# Altium PCB TP1 Embebidos.PcbDoc
Units mm, origin at the board's own origin, x right, y up, seen from the top; angles counter-clockwise.
Board outline 100 x 100 mm, 2 copper layers (Top Layer, Bottom Layer); 23 components, 30 nets, 140 pads, 0 vias.
Unrouted connection lines stored in the file: 8.
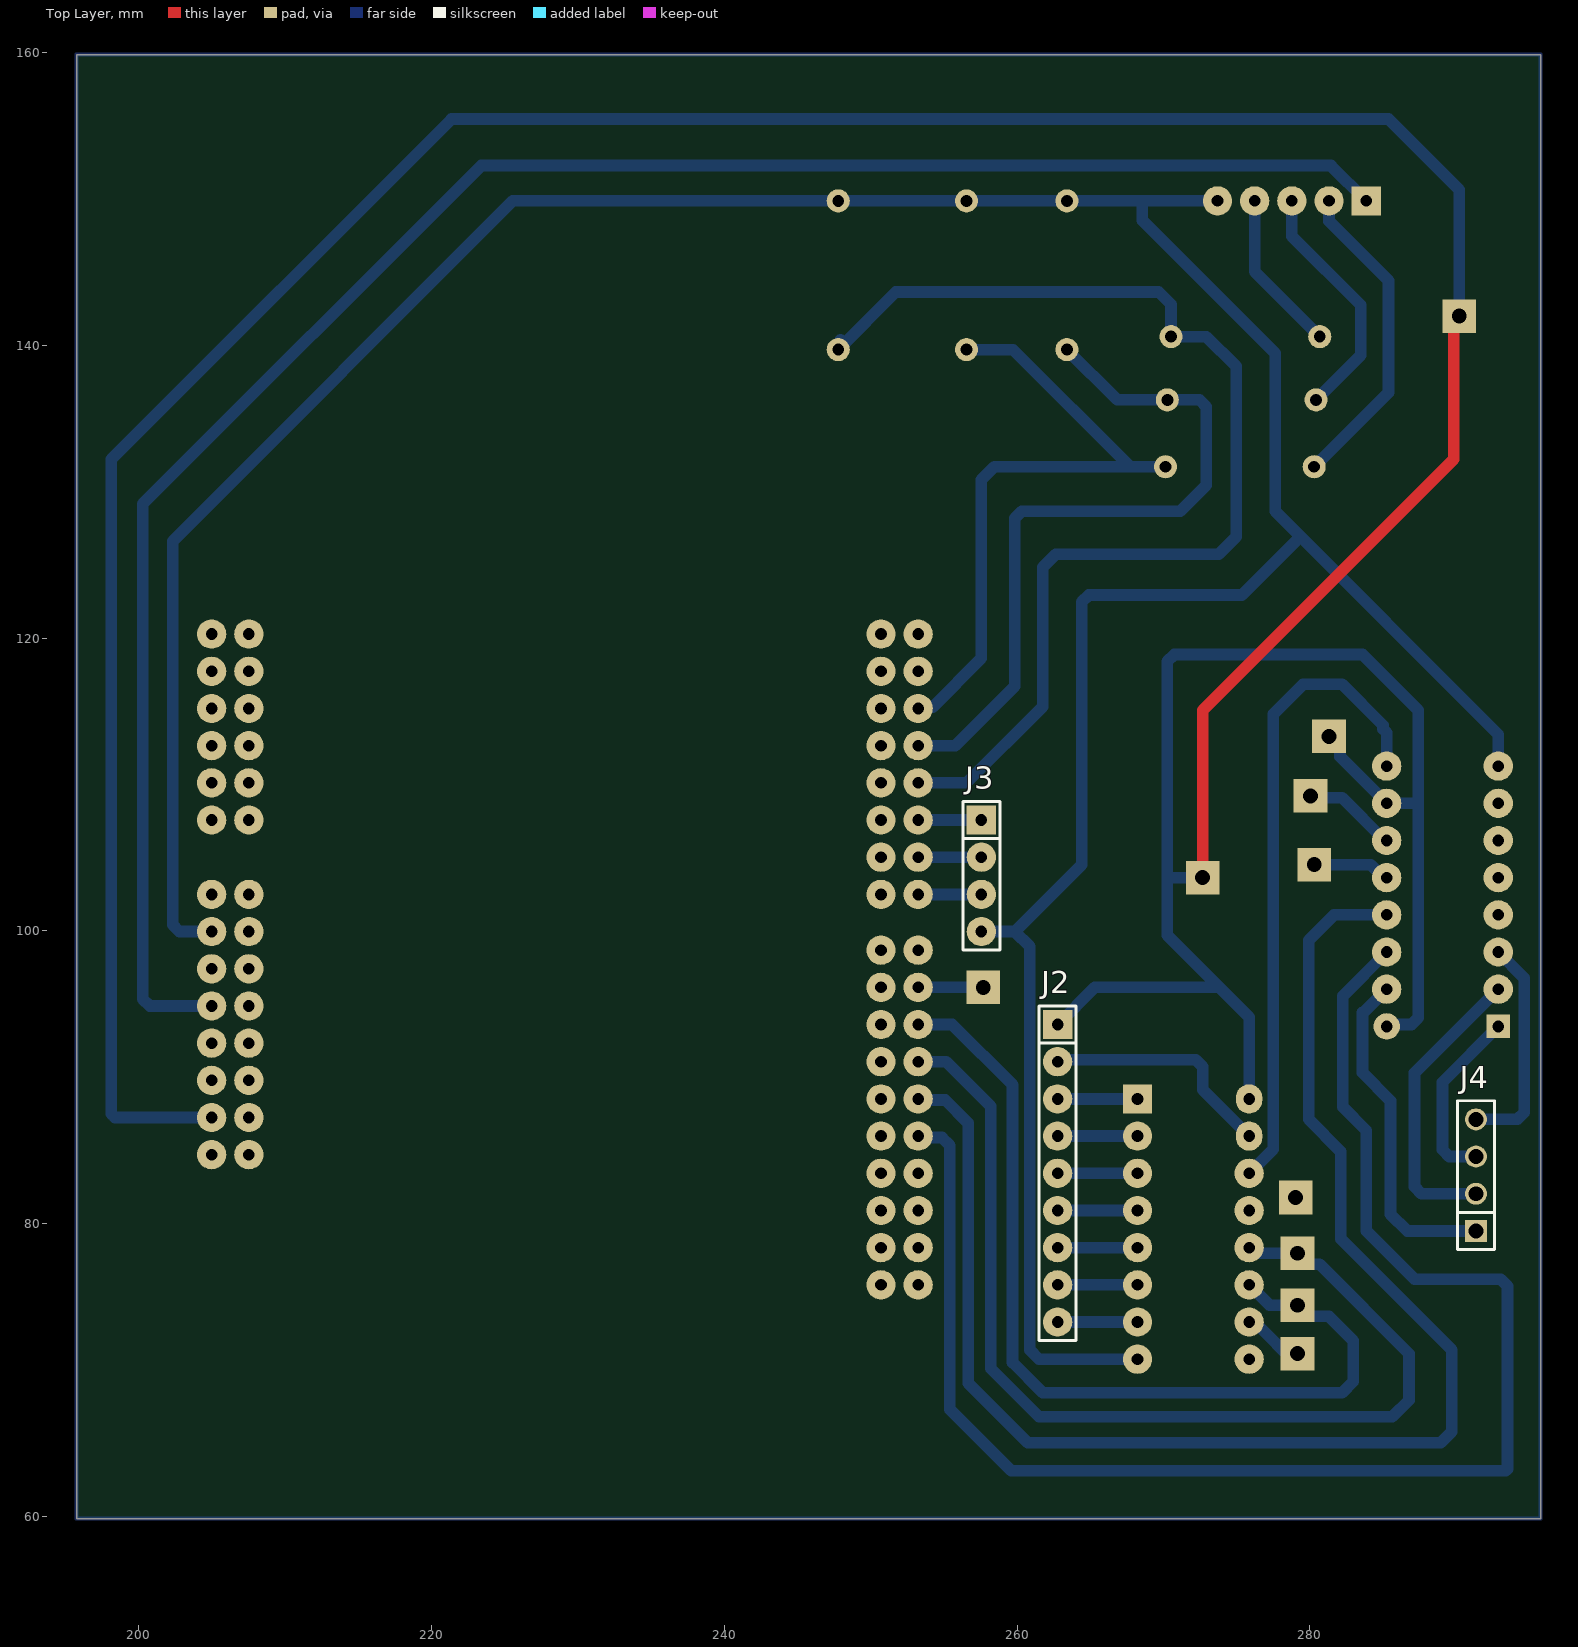
[diagram p0: Top Layer view]
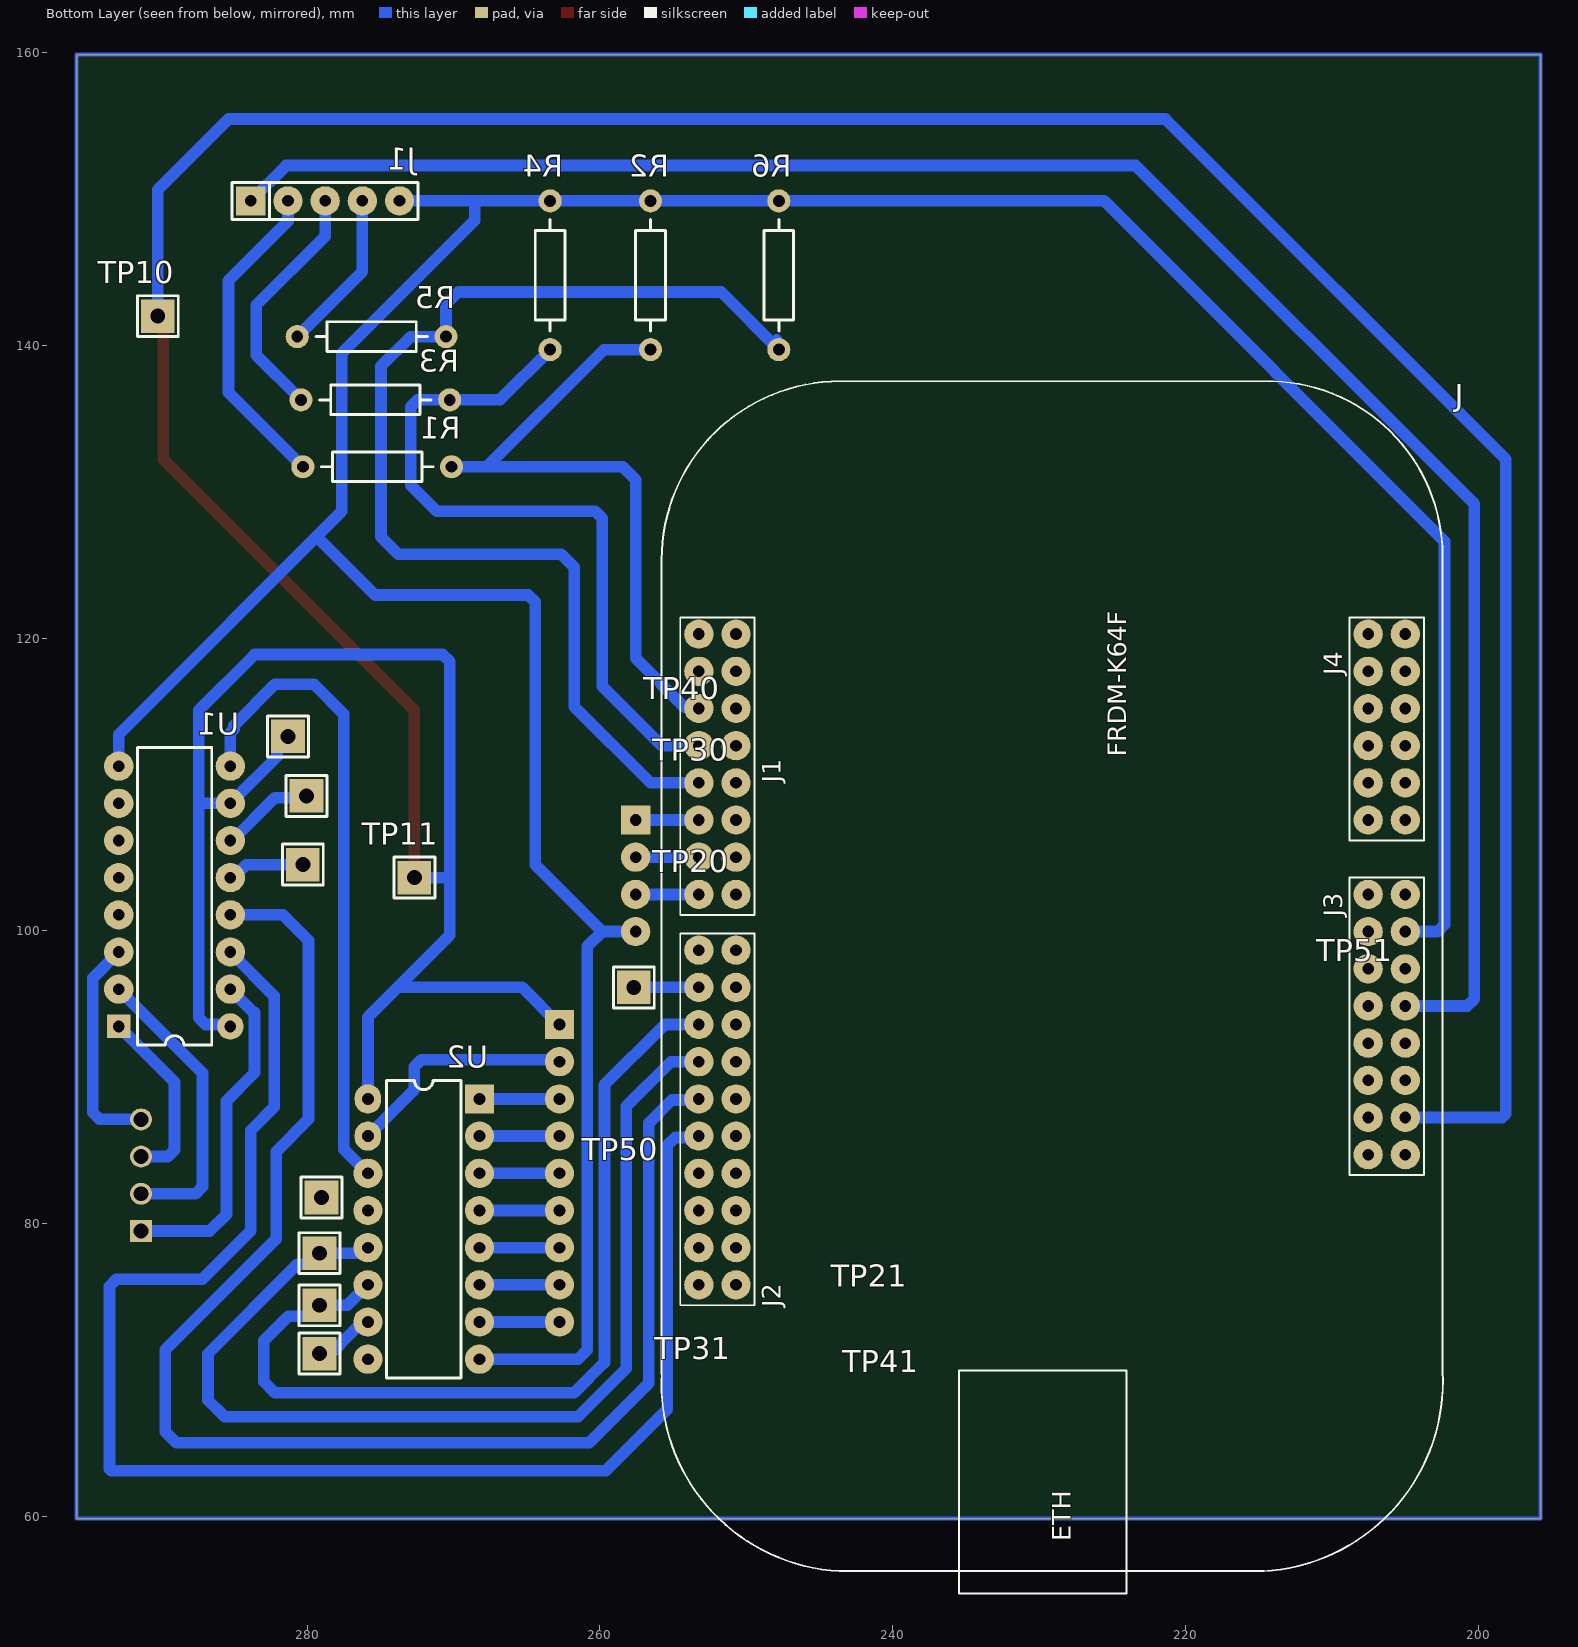
[diagram p1: Bottom Layer view, seen from below]

## Layer stack, top to bottom
Top Solder: solder mask 0.0102, Solder Resist, Dk 3.5
Top Layer: signal copper 0.0356
Dielectric 1: dielectric 0.32, FR-4, Dk 4.8
Bottom Layer: signal copper 0.0356
Bottom Solder: solder mask 0.0102, Solder Resist, Dk 3.5

## Board outline
195.747,59.858 295.747,59.858 295.747,159.858 195.747,159.858

## Design rules (kind name [scope] priority, off if disabled: settings)
Clearance [All] p1: gap=0.254 ignorepadtopadclearanceinfootprint=FALSE
PolygonConnect [All] p1: connectstyle=Relief reliefconductorwidth=0.254 reliefentries=4 polygonreliefangle="90 Angle" airgapwidth=0.254
RoutingVias [All] p1: holewidth=0.711 width=1.27 viastyle="Through Hole" minholewidth=0.711 minwidth=1.27 maxholewidth=0.711 maxwidth=1.27
SolderMaskExpansion [All] p1: expansion=0.102 istentingtop=FALSE
SupplyNets "Schematic Supply Nets" [InNet('GND')] p1: voltage=0.000
Width [All] p1: maxlimit=1 minlimit=0.5 preferedwidth=0.8 minimp=50.000000 maximp=50.000000 favimp=50.000000
30 further rules are at their usual default settings.

## Components (designator, comment, footprint, x,y, rotation, side; value= is the part's Value field where it differs from the comment)
J "FRDM-K64F" FRDM-K64F 229.108,96.647 r90 bottom
J1 "CON5" SIP5 283.845,149.86 r180 bottom
J2 "CON9" SIP9 262.763,93.599 r270 top
J3 "CON4" SIP4#1 257.556,103.759 r270 top
J4 "CON4" SIP4#2 291.338,83.312 r90 top
R1 "3K3" RES400 270.129,131.699 r0 bottom
R2 "6K8" RES400 256.54,149.86 r270 bottom
R3 "3K3" RES400 270.256,136.271 r0 bottom
R4 "6K8" RES400 263.398,149.86 r270 bottom
R5 "3K3" RES400 270.51,140.589 r0 bottom
R6 "6K8" RES400 247.777,149.86 r270 bottom
TP10 "TP" TPTH 290.195,141.986 r90 bottom
TP11 "TP" TPTH 272.669,103.632 r180 bottom
TP20 "TP" TPTH 280.289,104.521 r90 bottom
TP21 "TP" TPTH 279.146,77.978 r90 bottom
TP30 "TP" TPTH 280.035,109.22 r90 bottom
TP31 "TP" TPTH 279.146,74.422 r90 bottom
TP40 "TP" TPTH 281.305,113.284 r90 bottom
TP41 "TP" TPTH 279.146,71.12 r90 bottom
TP50 "TP" TPTH 279.019,81.788 r90 bottom
TP51 "TP" TPTH 257.683,96.139 r90 bottom
U1 "74HC595" DIP16#1 292.862,93.472 r180 bottom
U2 "74HC595" DIP16#2 268.224,88.519 r0 bottom

## Footprints (in the part's own frame and the unit in brackets; to place one, negate y for a bottom-side part, rotate by r counter-clockwise, add the part's x,y. Pads: shape width x height; smd on the part's side, far side on the other; paste and mask are expansions set on the pad)
DIP16#1 [mm]
  rect 1.6x1.6 hole 0.8: 1(0,0)
  round 2 hole 0.8: 2(0,2.54) 3(0,5.08) 4(0,7.62) 5(0,10.16) 6(0,12.7) 7(0,15.24) 8(0,17.78) 9(7.62,17.78) 10(7.62,15.24) 11(7.62,12.7) 12(7.62,10.16) 13(7.62,7.62) 14(7.62,5.08) 15(7.62,2.54)
  round 1.8 hole 0.8: 16(7.62,0)
  silkscreen extent 1.27,-1.27 6.35,19.05, body extent -0.08,-1.11 7.79,18.89, height 1.98
DIP16#2 [mm]
  rect 2x2 hole 0.8: 1(0,0)
  round 2 hole 0.8: 2(0,2.54) 3(0,5.08) 4(0,7.62) 5(0,10.16) 6(0,12.7) 7(0,15.24) 8(0,17.78) 9(7.62,17.78) 10(7.62,15.24) 11(7.62,12.7) 12(7.62,10.16) 13(7.62,7.62) 14(7.62,5.08)
  oval 1.8x2 hole 0.8: 15(7.62,2.54) 16(7.62,0)
  silkscreen extent 1.27,-1.27 6.35,19.05, body extent -0.08,-1.11 7.79,18.89, height 1.98
FRDM-K64F [mm]
  round 2 hole 0.8: J1-1(23.622,21.59) J1-2(23.622,24.13) J1-3(21.082,21.59) J1-4(21.082,24.13) J1-5(18.542,21.59) J1-6(18.542,24.13) J1-7(16.002,21.59) J1-8(16.002,24.13) J1-9(13.462,21.59) J1-10(13.462,24.13) J1-11(10.922,21.59) J1-12(10.922,24.13) J1-13(8.382,21.59) J1-14(8.382,24.13) J1-15(5.842,21.59) J1-16(5.842,24.13) J2-1(2.032,21.59) J2-2(2.032,24.13) J2-3(-0.508,21.59) J2-4(-0.508,24.13) J2-5(-3.048,21.59) J2-6(-3.048,24.13) J2-7(-5.588,21.59) J2-8(-5.588,24.13) J2-9(-8.128,21.59) J2-10(-8.128,24.13) J2-11(-10.668,21.59) J2-12(-10.668,24.13) J2-13(-13.208,21.59) J2-14(-13.208,24.13) J2-15(-15.748,21.59) J2-16(-15.748,24.13) J2-17(-18.288,21.59) J2-18(-18.288,24.13) J2-19(-20.828,21.59) J2-20(-20.828,24.13) J3-1(-11.938,-21.59) J3-2(-11.938,-24.13) J3-3(-9.398,-21.59) J3-4(-9.398,-24.13) J3-5(-6.858,-21.59) J3-6(-6.858,-24.13) J3-7(-4.318,-21.59) J3-8(-4.318,-24.13) J3-9(-1.778,-21.59) J3-10(-1.778,-24.13) J3-11(0.762,-21.59) J3-12(0.762,-24.13) J3-13(3.302,-21.59) J3-14(3.302,-24.13) J3-15(5.842,-21.59) J3-16(5.842,-24.13) J4-1(10.922,-21.59) J4-2(10.922,-24.13) J4-3(13.462,-21.59) J4-4(13.462,-24.13) J4-5(16.002,-21.59) J4-6(16.002,-24.13) J4-7(18.542,-21.59) J4-8(18.542,-24.13) J4-9(21.082,-21.59) J4-10(21.082,-24.13) J4-11(23.622,-21.59) J4-12(23.622,-24.13)
  silkscreen extent -41.91,-26.69 40.89,26.69
RES400 [mil]
  round 62 hole 32: 1(0,0) 2(400,0)
  silkscreen extent 50,-40 350,40, body extent -12,-46 412,45, height 80
SIP4#1 [mm]
  rect 2x2 hole 0.8: 1(-3.81,0)
  round 2 hole 0.8: 2(-1.27,0) 3(1.27,0) 4(3.81,0)
  silkscreen extent -5.08,-1.27 5.08,1.27, body extent -5.08,-1.27 5.08,1.27, height 8.38
SIP4#2 [mm]
  rect 1.5x1.5 hole 1.016: 1(-3.81,0)
  round 1.5 hole 1.016: 2(-1.27,0) 3(1.27,0) 4(3.81,0)
  silkscreen extent -5.08,-1.27 5.08,1.27, body extent -5.08,-1.27 5.08,1.27, height 8.38
SIP5 [mm]
  rect 2x2 hole 0.8: 1(0,0)
  round 2 hole 0.8: 2(2.54,0) 3(5.08,0) 4(7.62,0) 5(10.16,0)
  silkscreen extent -1.27,-1.27 11.43,1.27, body extent -1.27,-1.27 11.43,1.27, height 2.54
SIP9 [mm]
  rect 2x2 hole 0.8: 1(0,0)
  round 2 hole 0.8: 2(2.54,0) 3(5.08,0) 4(7.62,0) 5(10.16,0) 6(12.7,0) 7(15.24,0) 8(17.78,0) 9(20.32,0)
  silkscreen extent -1.27,-1.27 21.59,1.27, body extent -1.27,-1.3 21.59,1.24, height 8.38
TPTH [mm]
  rect 2.3x2.3 hole 1.016: 1(0,0)
  silkscreen extent -1.4,-1.4 1.4,1.4, body extent -1.27,-1.27 1.27,1.27, height 6.04

## Part data
J: "K24, K63, K64, mbed-Enabled Development Freedom Kinetis ARMÂ® CortexÂ®-M4 MCU 32-Bit Embedded Evaluation Board", Package=None, Availability=Unavailable, MF="NXP USA", MP=FRDM-K64F, Price=None, SnapEDA_Link=https://www.snapeda.com/parts/FRDM-K64F/NXP%20USA%20Inc./view-part/508270/?ref=snap
R1 R2 R3 R4 R5 R6: library part RES

## Nets (pads, with @x,y where several pads share a name; then routed paths per layer and width w, separated by ;. In a path a pad name is that pad's centre, name@x,y a point inside that pad or via, vN(x,y) a via of type N, cw(c..) or ccw(c..) an arc to the next point about the centre after c; other vN are vias at no path point)
3V3: J2.1 J.J3-4 TP10.1 TP11.1 TP40.1 TP41.1 U1.10 U1.16 U2.10 U2.16 | length 311.6
  Top Layer w0.8: TP11.1 272.669,115.062 289.814,132.207 289.814,141.605 TP10.1
  Bottom Layer w0.8: J.J3-4 198.374,87.249 198.12,87.503 198.12,132.207 221.361,155.448 285.369,155.448 290.195,150.622 TP10.1 ; J2.1 265.303,96.139 273.812,96.139 ; TP11.1 270.256,103.632 ; U2.10 276.04,73.279 276.402,72.917 276.587,72.917 278.765,70.739 TP41.1 ; U2.16 275.844,94.107 273.812,96.139 ; TP40.1 282.055,112.534 282.055,111.899 U1.10 287.401,108.712 ; U1.16@285.115,93.599 286.932,93.599 287.401,94.068 287.401,108.712 ; 270.256,103.632 270.256,118.403 270.725,118.872 283.591,118.872 287.401,115.062 287.401,108.712 ; 270.256,103.632 270.256,99.695 273.812,96.139
5V: J1.1 J.J3-10 | length 132.9
  Bottom Layer w0.8: J.J3-10 200.748,94.869 200.279,95.338 200.279,129.159 223.393,152.273 281.432,152.273 J1.1
A: J.J2-12 U1.14 | length 105
  Bottom Layer w0.8: J.J2-12 253.335,85.882 254.859,85.882 255.397,85.344 255.397,67.31 259.588,63.119 293.37,63.119 293.497,63.246 293.497,75.731 293.028,76.2 287.147,76.2 283.845,79.502 283.845,86.36 282.232,87.973 282.232,95.542 U1.14
CLOCK: J1.3 R3.2 | length 16.8
  Bottom Layer w0.8: J1.3 278.765,147.447 283.464,142.748 283.464,139.319 R3.2
CSEGA: J2.2 U2.15 | length 16.2
  Bottom Layer w0.8: J2.2 262.89,91.186 272.2,91.186 272.669,90.717 272.669,89.154 U2.15
CSEGB: J2.3 U2.1 | length 5.5
  Bottom Layer w0.8: J2.3 U2.1
CSEGC: J2.4 U2.2 | length 5.5
  Bottom Layer w0.8: J2.4 U2.2
CSEGD: J2.5 U2.3 | length 5.5
  Bottom Layer w0.8: J2.5 U2.3
CSEGDP: J2.9 U2.7 | length 5.5
  Bottom Layer w0.8: J2.9 U2.7
CSEGE: J2.6 U2.4 | length 5.5
  Bottom Layer w0.8: J2.6 U2.4
CSEGF: J2.7 U2.5 | length 5.5
  Bottom Layer w0.8: J2.7 U2.5
CSEGG: J2.8 U2.6 | length 5.5
  Bottom Layer w0.8: J2.8 U2.6
DATA: J1.4 R5.2 | length 11.1
  Bottom Layer w0.8: J1.4 276.225,145.034 R5.2 R5.2@280.67,140.606
ENABLE: J1.2 R1.2 | length 21.9
  Bottom Layer w0.8: R1.2 285.369,136.779 285.369,144.399 281.305,148.463 J1.2
GND: J1.5 J3.4 J.J2-3 J.J2-14 J.J3-12 J.J3-14 R2.1 R4.1 R6.1 U1.8 U2.8 | length 238.4
  Bottom Layer w0.8: J.J3-14 202.78,99.949 202.311,100.418 202.311,126.619 225.552,149.86 R6.1 R2.1 R4.1 268.541,149.86 ; J3.4 259.842,99.949 ; U2.8 261.493,70.739 260.858,71.374 260.858,98.933 259.842,99.949 ; J1.5 268.541,149.86 ; 279.019,126.619 275.336,122.936 264.883,122.936 264.414,122.467 264.414,104.521 259.842,99.949 ; U1.8 292.862,113.411 277.622,128.651 277.622,139.446 268.541,148.526 268.541,149.86
"LATCH CLOCK": J.J2-8 TP20.1 TP21.1 U1.12 U2.12 | length 77
  Bottom Layer w0.8: J.J2-8 255.143,91.059 258.191,88.011 258.191,70.104 261.493,66.802 285.623,66.802 286.766,67.945 286.766,71.12 280.658,77.228 279.896,77.228 TP21.1 276.421,77.978 276.04,78.359 U2.12 ; TP20.1 284.157,104.521 285.046,103.632 U1.12
NetU1_9: U1.9 U2.14 | length 44.6
  Bottom Layer w0.8: U2.14 277.495,85.09 277.495,114.808 279.527,116.84 282.194,116.84 284.988,114.046 284.988,113.792 285.242,113.538 U1.9 U1.9@285.242,111.448
OE1: J.J2-10 U1.13 | length 100.6
  Bottom Layer w0.8: J.J2-10 253.314,88.443 255.092,88.443 256.667,86.868 256.667,69.088 260.731,65.024 288.925,65.024 289.687,65.786 289.687,71.374 282.107,78.954 282.107,84.923 279.908,87.122 279.908,99.353 281.647,101.092 U1.13
OE2: J.J2-4 TP50.1 TP51.1 U2.13 | length 4.4
  Bottom Layer w0.8: J.J2-4 TP51.1
PTA1: J.J1-8 R3.1 R4.2 | length 50.3
  Bottom Layer w0.8: J.J1-8 255.778,112.649 259.842,116.713 259.842,128.182 260.311,128.651 271.145,128.651 272.923,130.429 272.923,135.802 272.454,136.271 R3.1 266.827,136.271 R4.2
PTB9: J.J1-6 R1.1 R2.2 | length 45.4
  Bottom Layer w0.8: J.J1-6 253.335,115.286 254.224,115.286 257.556,118.618 257.556,130.81 258.445,131.699 267.716,131.699 ; R2.2 259.715,139.7 267.716,131.699 ; R1.1 267.716,131.699
PTB23: J.J1-10 R5.1 R6.2 | length 78.8
  Bottom Layer w0.8: R6.2@247.925,140.356 247.925,139.848 R6.2 251.714,143.637 269.66,143.637 270.51,142.787 R5.1 272.923,140.589 274.955,138.557 274.955,126.917 273.768,125.73 262.636,125.73 261.747,124.841 261.747,115.316 256.54,110.109 J.J1-10
RCHA: J3.3 J.J1-16 | length 4.3
  Bottom Layer w0.8: J.J1-16 J3.3
RCHB: J3.2 J.J1-14 | length 4.3
  Bottom Layer w0.8: J.J1-14 J3.2
RSwitch: J3.1 J.J1-12 | length 4.3
  Bottom Layer w0.8: J.J1-12 J3.1
sel0: J4.1 U1.15 | length 23.2
  Bottom Layer w0.8: U1.15 283.647,94.417 283.591,94.417 283.591,90.297 285.496,88.392 285.496,80.645 286.639,79.502 J4.1
sel1: J4.3 U1.1 | length 12.5
  Bottom Layer w0.8: J4.3 289.521,84.582 289.052,85.051 289.052,89.662 U1.1
"SHIFT CLOCK": J.J2-6 TP30.1 TP31.1 U1.11 U2.11 | length 69.7
  Bottom Layer w0.8: J.J2-6 255.563,93.599 259.686,89.477 259.686,70.514 261.747,68.453 282.194,68.453 282.956,69.215 282.956,72.009 281.293,73.672 279.896,73.672 TP31.1 277.241,74.422 U2.11 ; TP30.1@280.162,109.347 TP30.1 280.162,109.093 282.194,109.093 285.115,106.172 U1.11
Status0: J4.2 U1.2 | length 20.3
  Bottom Layer w0.8: J4.2 287.616,82.042 287.147,82.511 287.147,90.297 U1.2
Status1: J4.4 U1.3 | length 15.2
  Bottom Layer w0.8: J4.4 294.171,87.122 294.64,87.591 294.64,96.774 U1.3
pads on no net: J.J1-1 J.J1-2 J.J1-3 J.J1-4 J.J1-5 J.J1-7 J.J1-9 J.J1-11 J.J1-13 J.J1-15 J.J2-1 J.J2-2 J.J2-5 J.J2-7 J.J2-9 J.J2-11 J.J2-13 J.J2-15 J.J2-16 J.J2-17 J.J2-18 J.J2-19 J.J2-20 J.J3-1 J.J3-2 J.J3-3 J.J3-5 J.J3-6 J.J3-7 J.J3-8 J.J3-9 J.J3-11 J.J3-13 J.J3-15 J.J3-16 J.J4-1 J.J4-2 J.J4-3 J.J4-4 J.J4-5 J.J4-6 J.J4-7 J.J4-8 J.J4-9 J.J4-10 J.J4-11 J.J4-12 U1.4 U1.5 U1.6 U1.7 U2.9
copper on no net: | length 400
  Bottom Layer w0.254: 195.747,59.858 195.747,159.858 295.747,159.858 295.747,59.858 195.747,59.858

## Text inside footprints (layer, text, board x,y; h text height)
J: Bottom Overlay "J1" at 247.65,110.109 h1.27 r270; Bottom Overlay "J2" at 247.65,74.295 h1.27 r270; Bottom Overlay "J4" at 209.296,117.475 h1.27 r270; Bottom Overlay "J3" at 209.296,100.965 h1.27 r270; Bottom Overlay "ETH" at 227.838,58.293 h1.27 r270